# Altium PCB MB1642.PcbDoc
Units mil, origin at the board's own origin, x right, y up, seen from the top; angles counter-clockwise.
Board outline 2770.03 x 2960.03 mil, 2 copper layers (Top Layer, Bottom Layer), stack 61.811 mil thick; 33 components, 28 nets, 241 pads, 137 vias.
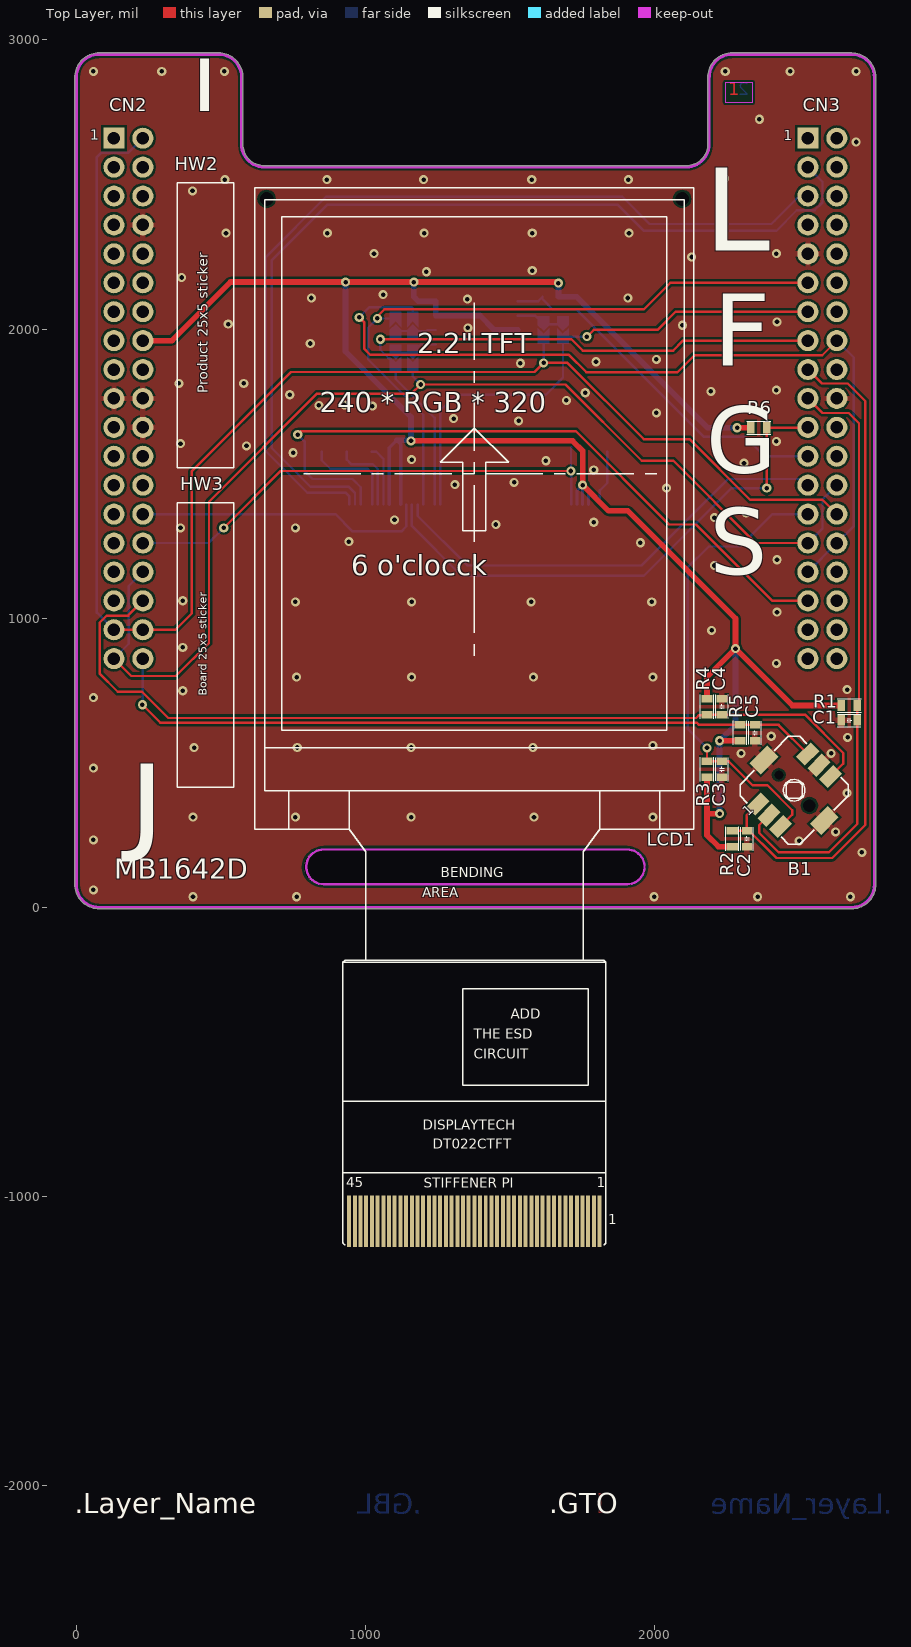
[diagram p0: Top Layer view]
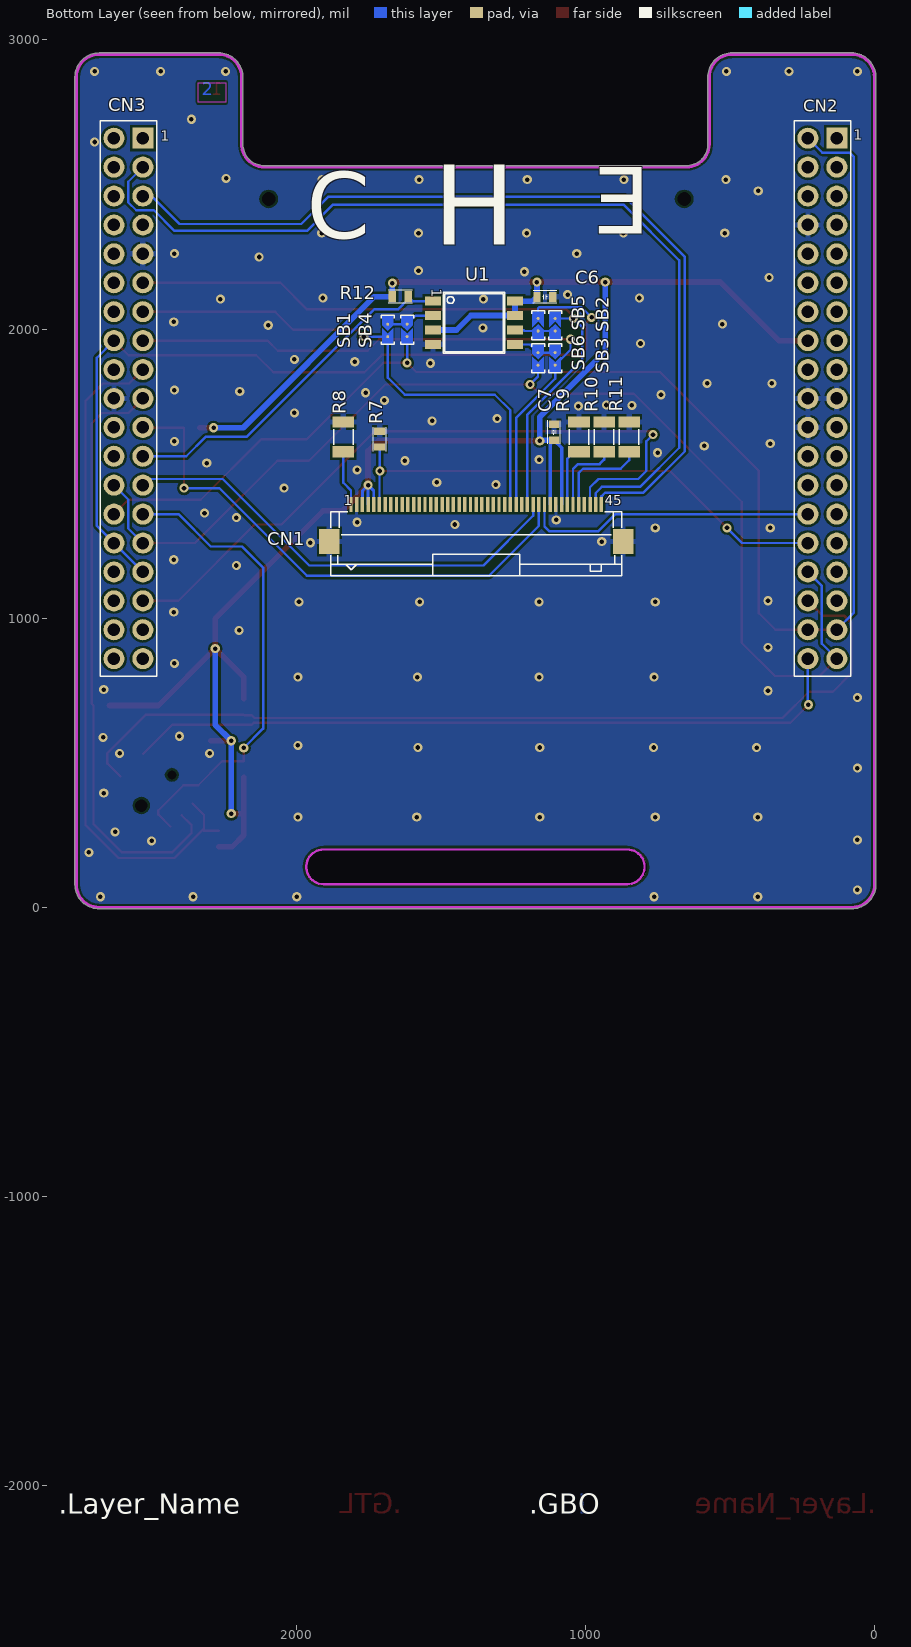
[diagram p1: Bottom Layer view, seen from below]
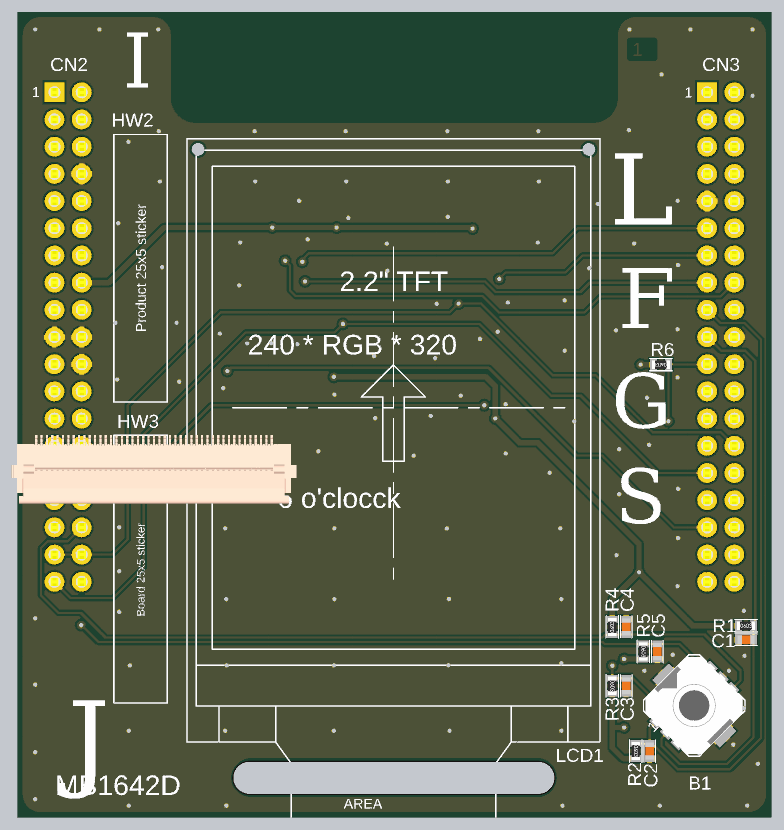
[diagram p2: 3D render of the assembled board from above, using the file's embedded part models]
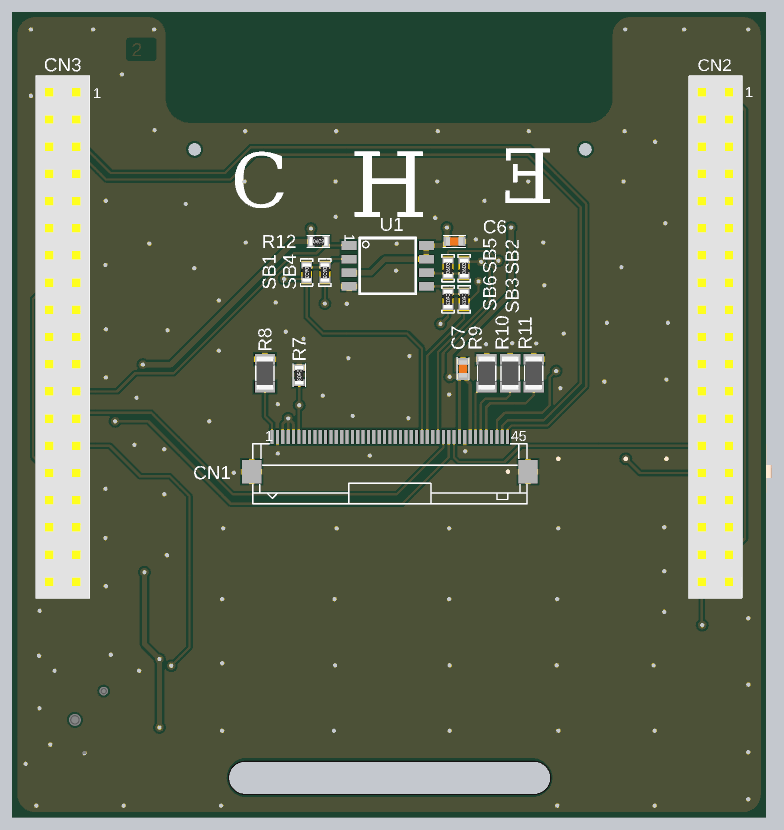
[diagram p3: 3D render of the assembled board from below, using the file's embedded part models]

## Layer stack, top to bottom
Top Solder: solder mask 0.5906, Solder Resist, Dk 3.5
Top Layer: signal copper 1.378
Dielectric 1: core 59.0551, FR-4, Dk 4.2
Bottom Layer: signal copper 1.378
Bottom Solder: solder mask 0.5906, Solder Resist, Dk 3.5

## Board outline
-5.01,78.74 ccw(c78.74,78.74) 78.74,-5.02 2677.17,-5.02 ccw(c2677.17,0) 2679.13,-4.61 ccw(c2681.1,0) 2681.1,-5.02 ccw(c2681.1,78.74) 2764.86,78.74 ccw(c2759.84,78.74) 2764.5,80.61 ccw(c2760,82.83) 2765.01,82.83 2765.01,2871.1 ccw(c2760,2871.1) 2764.85,2872.38 ccw(c2681.1,2871.26) 2681.1,2955.02 2267.72,2955.02 ccw(c2267.72,2871.26) 2183.96,2871.26 2183.96,2638.98 cw(c2110.24,2638.98) 2110.24,2565.25 ccw(c2110.24,2560.24) 2108.72,2565.02 804.26,2565.02 ccw(c802.74,2560.24) 802.74,2565.25 649.61,2565.25 cw(c649.61,2638.98) 575.88,2638.98 575.88,2871.26 cw(c570.87,2871.26) 575.88,2871.23 575.88,2871.26 ccw(c492.13,2871.26) 492.13,2955.02 78.74,2955.02 ccw(c78.74,2871.26) -5.01,2871.26

## Design rules (kind name [scope] priority, off if disabled: settings)
Clearance Clearance_SB [HasFootprint('SOLDER-BRIDGE_R0603-0R')] p1: gap=4 ignorepadtopadclearanceinfootprint=FALSE except(0: Arc-Hole Track-Hole SMDPad-Hole THPad-Hole Via-Hole Fill-Hole Poly-Hole Region-Hole Text-Hole)
Clearance [All] p2: gap=7.87 ignorepadtopadclearanceinfootprint=FALSE except(0: Arc-Hole Track-Hole SMDPad-Hole THPad-Hole Via-Hole Fill-Hole Poly-Hole Region-Hole Text-Hole)
ComponentClearance [All] p1: gap=7.87 collisioncheckmode=3 verticalgap=7.87 showdistances=FALSE
HoleSize [All] p1: absolutevalues=TRUE maxlimit=9999 minlimit=1 maxpercent=80.000 minpercent=20.000
MinimumSolderMaskSliver [All] p1: minsoldermaskwidth=2
PlaneConnect [All] p1: planeconnectstyle=Relief reliefexpansion=20 reliefentries=4 reliefconductorwidth=8.27 reliefairgap=8.27
PolygonConnect PolygonConnect_via [IsVia] p1: connectstyle=Direct reliefconductorwidth=10 reliefentries=4 polygonreliefangle="90 Angle" airgapwidth=10
PolygonConnect [All] p2: connectstyle=Relief reliefconductorwidth=20 reliefentries=4 polygonreliefangle="90 Angle" airgapwidth=7
RoutingVias [All] p1: holewidth=11.81 width=31.5 viastyle="Through Hole" minholewidth=11.81 minwidth=31.5 maxholewidth=11.81 maxwidth=31.5
SilkToSilkClearance [All] p1: silktosilkclearance=0.5
SilkToSolderMaskClearance [IsPad] p1: minsilkscreentomaskgap=0.5 clearancetoexposedcopper=TRUE
SolderMaskExpansion [All] p1: expansion=4 istentingtop=FALSE
Width [All] p1: maxlimit=39.37 minlimit=7.87 preferedwidth=7.87 minimp=50.000000 maximp=50.000000 favimp=50.000000
24 further rules are at their usual default settings.

## Components (designator, comment, footprint, x,y, rotation, side; value= is the part's Value field where it differs from the comment)
B1 "Joystick MT-008A_M" SWI_XIEJIA_MT-008A_6P 2482.35,405 r45 top value=MT-008A
C1 "Capacitor" C0603 2673.23,646.85 r0 top value=10nF
C2 "Capacitor" C0603 2318.9,237.4 r90 top value=10nF
C3 "Capacitor" C0603 2232.28,477.56 r90 top value=10nF
C4 "Capacitor" C0603 2232.28,694.09 r270 top value=10nF
C5 "Capacitor" C0603 2346.46,603.54 r90 top value=10nF
C6 "Capacitor" C0603 1139.65,2111.42 r180 bottom value=100nF
C7 "Capacitor" C0603 1108.15,1642.91 r270 bottom value=100nF
CN1 "FH12-45S-0.5SH(55)" CON_HRS_FH12-45S-05SH 1377.13,1393.11 r180 bottom
CN2 "Socket 19x2" CON_SAMTEC_SSW-119-01-X-D 180,1760 r90 bottom locked
CN3 "Socket 19x2" CON_SAMTEC_SSW-119-01-X-D 2580,1760 r90 bottom locked
HW2 "STICKER_PRODUCT" STICKER_PRODUCT_25X5 446.73,2012.99 r90 top value="Sticker product"
HW3 "STICKER_BOARD" STICKER_BOARD_25X5 446.73,906.69 r90 top value="Sticker board"
LCD1 "DT022CTFT" LCD_DISPLAYTECH_DT022CTFT_45P_P050 1376.5,1500 r0 top locked
R1 "Resistor" R0603 2673.23,698.03 r0 top value=10K
R2 "Resistor" R0603 2267.72,237.4 r270 top value=10K
R3 "Resistor" R0603 2181.1,477.56 r270 top value=10K
R4 "Resistor" R0603 2181.1,694.09 r90 top value=10K
R5 "Resistor" R0603 2295.28,603.54 r270 top value=10K
R6 "Resistor" R0603 2360.12,1658.66 r180 top value=10K
R7 "Resistor" R0603 1710.51,1619.29 r270 bottom value=10K
R8 "Resistor" R1206_H0P55 1836.5,1627.17 r270 bottom value=24R9
R9 "Resistor" R1206_H0P55 1021.54,1627.17 r270 bottom value=24R9
R10 "Resistor" R1206_H0P55 934.92,1627.17 r270 bottom value=24R9
R11 "Resistor" R1206_H0P55 848.31,1627.17 r270 bottom value=24R9
R12 "Resistor" R0603 1639.65,2111.42 r180 bottom value=10K
SB1 "SB_OFF" SOLDER-BRIDGE_R0603-0R 1682.95,1997.24 r270 bottom
SB2 "SB_OFF" SOLDER-BRIDGE_R0603-0R 1104.21,2012.99 r90 bottom
SB3 "SB_OFF" SOLDER-BRIDGE_R0603-0R 1104.21,1898.82 r270 bottom
SB4 "SB_OFF" SOLDER-BRIDGE_R0603-0R 1616.02,1997.24 r270 bottom
SB5 "SB_OFF" SOLDER-BRIDGE_R0603-0R 1163.27,2012.99 r90 bottom
SB6 "SB_OFF" SOLDER-BRIDGE_R0603-0R 1163.27,1898.82 r270 bottom
U1 "MX25L6433FM2I-08G" ICC_SOP8_5P23X5P28_P127 1385,2021.54 r270 bottom

## Footprints (in the part's own frame and the unit in brackets; to place one, negate y for a bottom-side part, rotate by r counter-clockwise, add the part's x,y. Pads: shape width x height; smd on the part's side, far side on the other; paste and mask are expansions set on the pad)
C0603 [mm]
  rect 0.64x0.89 smd mask+0.05: 1(-0.7,0) 2(0.7,0)
  silkscreen extent -1.05,-0.55 1.02,0.55, body extent -0.9,-0.5 0.9,0.5, height 1.4
CON_HRS_FH12-45S-05SH [mm] "MCD-01980"
  rect 0.3x1.3 smd mask+0.05: 1(-11,0) 2(-10.5,0) 3(-10,0) 4(-9.5,0) 5(-9,0) 6(-8.5,0) 7(-8,0) 8(-7.5,0) 9(-7,0) 10(-6.5,0) 11(-6,0) 12(-5.5,0) 13(-5,0) 14(-4.5,0) 15(-4,0) 16(-3.5,0) 17(-3,0) 18(-2.5,0) 19(-2,0) 20(-1.5,0) 21(-1,0) 22(-0.5,0) 23(0,0) 24(0.5,0) 25(1,0) 26(1.5,0) 27(2,0) 28(2.5,0) 29(3,0) 30(3.5,0) 31(4,0) 32(4.5,0) 33(5,0) 34(5.5,0) 35(6,0) 36(6.5,0) 37(7,0) 38(7.5,0) 39(8,0) 40(8.5,0) 41(9,0) 42(9.5,0) 43(10,0) 44(10.5,0) 45(11,0)
  rect 1.8x2.2 smd mask+0.05: MT1(12.9,-3.25) MT2(-12.9,-3.25)
  silkscreen extent -12.8,-6.25 12.8,-0.65, body extent -13.3,-6.25 13.3,0.15, height 4.8
CON_SAMTEC_SSW-119-01-X-D [mm] "MCD-01845"
  rect 1.85x1.85 / inner round 1.85 / far side rect 1.85x1.85 hole 1.1 mask+0.05: 1(22.86,-1.27)
  round 1.85 hole 1.1 mask+0.05: 2(22.86,1.27) 3(20.32,-1.27) 4(20.32,1.27) 5(17.78,-1.27) 6(17.78,1.27) 7(15.24,-1.27) 8(15.24,1.27) 9(12.7,-1.27) 10(12.7,1.27) 11(10.16,-1.27) 12(10.16,1.27) 13(7.62,-1.27) 14(7.62,1.27) 15(5.08,-1.27) 16(5.08,1.27) 17(2.54,-1.27) 18(2.54,1.27) 19(0,-1.27) 20(0,1.27) 21(-2.54,-1.27) 22(-2.54,1.27) 23(-5.08,-1.27) 24(-5.08,1.27) 25(-7.62,-1.27) 26(-7.62,1.27) 27(-10.16,-1.27) 28(-10.16,1.27) 29(-12.7,-1.27) 30(-12.7,1.27) 31(-15.24,-1.27) 32(-15.24,1.27) 33(-17.78,-1.27) 34(-17.78,1.27) 35(-20.32,-1.27) 36(-20.32,1.27) 37(-22.86,-1.27) 38(-22.86,1.27)
  silkscreen extent -24.39,-2.47 24.39,2.47, body extent -24.38,-2.48 24.39,2.48, height 8.51
ICC_SOP8_5P23X5P28_P127 [mm] "MCD-01740"
  rect 0.8x1.4 smd mask+0.05: 1(-1.905,-3.6) 2(-0.635,-3.6) 3(0.635,-3.6) 4(1.905,-3.6) 5(1.905,3.6) 6(0.635,3.6) 7(-0.635,3.6) 8(-1.905,3.6)
  silkscreen extent -2.67,-2.69 2.67,2.69, body extent -2.67,-4.05 2.67,4.05, height 2.17
LCD_DISPLAYTECH_DT022CTFT_45P_P050 [mm] "MCD-01982"
  rect 0.35x4.5 smd mask+0.038: 1(11,-65.68) 2(10.5,-65.68) 3(10,-65.68) 4(9.5,-65.68) 5(9,-65.68) 6(8.5,-65.68) 7(8,-65.68) 8(7.5,-65.68) 9(7,-65.68) 10(6.5,-65.68) 11(6,-65.68) 12(5.5,-65.68) 13(5,-65.68) 14(4.5,-65.68) 15(4,-65.68) 16(3.5,-65.68) 17(3,-65.68) 18(2.5,-65.68) 19(2,-65.68) 20(1.5,-65.68) 21(1,-65.68) 22(0.5,-65.68) 23(0,-65.68) 24(-0.5,-65.68) 25(-1,-65.68) 26(-1.5,-65.68) 27(-2,-65.68) 28(-2.5,-65.68) 29(-3,-65.68) 30(-3.5,-65.68) 31(-4,-65.68) 32(-4.5,-65.68) 33(-5,-65.68) 34(-5.5,-65.68) 35(-6,-65.68) 36(-6.5,-65.68) 37(-7,-65.68) 38(-7.5,-65.68) 39(-8,-65.68) 40(-8.5,-65.68) 41(-9,-65.68) 42(-9.5,-65.68) 43(-10,-65.68) 44(-10.5,-65.68) 45(-11,-65.68)
  round 0 hole 1.2 unplated mask+0.05: NPTH1(-18.25,24.13) NPTH2(18.25,24.13)
  silkscreen extent -19.29,-67.73 19.29,25.13, body extent -19.29,-67.73 19.29,25.13, height 2.5
R0603 [mm]
  rect 0.64x1 smd mask+0.05: 1(-0.7,0) 2(0.7,0)
  silkscreen extent -1.05,-0.58 1.05,0.58, body extent -0.9,-0.5 0.9,0.5, height 0.56
R1206_H0P55 [mm]
  rect 1x1.9 smd mask+0.05: 1(-1.3,0) 2(1.3,0)
  silkscreen extent -0.67,-0.85 0.67,0.85, body extent -1.6,-0.85 1.6,0.85, height 0.65
SOLDER-BRIDGE_R0603-0R [mil]
  round 10 smd paste-393.7: 1(-19.69,0) 2(23.62,0)
  Top Layer region: -5.91,19.68 13.78,0 -5.91,-19.69 47.24,-19.69 47.24,19.68 -5.91,19.68
  Top Layer region: -47.24,-19.69 -47.24,19.68 -15.75,19.68 3.94,0 -15.75,-19.69 -47.24,-19.69
  silkscreen extent -50,-23 50,23, body extent -36,-20 36,20, height 22
STICKER_BOARD_25X5 [mil] "Sticker to mention board reference + serial number"
  silkscreen extent -492,-98 492,98, body extent -492,-98 492,98, height 0
STICKER_PRODUCT_25X5 [mil] "Sticker to mention board CPN code"
  silkscreen extent -492,-98 492,98
SWI_XIEJIA_MT-008A_6P [mm] "MCD-00132"
  rect 1.8x1.1 smd mask+0.05: 1(-3.1,1.4) 2(-3.1,0) 3(-3.1,-1.4) 4(3.1,1.4) 5(3.1,0) 6(3.1,-1.4)
  rect 2.2x1.4 smd mask+0.05: 7(0,3.75) 8(0,-3.75)
  round 0 hole 0.8 unplated paste-10 mask+0.05: NPTH1(0,1.9)
  round 0 hole 1.1 unplated paste-10 mask+0.05: NPTH2(0,-1.9)
  silkscreen extent -3.7,-3.7 3.7,3.7, body extent -3.85,-3.75 3.85,3.75, height 5.2

## Part data
B1: library part MCD-00132, "Joystick, 4 dir, 1 OK", Manufacturer="XIEJIA ELECTRONICS", Manufacturer_Part_Number=MT-008A, BMS_Part_Number=9180124, ComponentLink1Description=Datasheet, ComponentLink1URL="http://tunmcdsvn.tun.st.com/Component_Datasheet_Library/Trunk/Misc/Xieja electronics_MT-008A", ECCN_EU=n/a, ECCN_US=n/a, Internal_Part_Number=MCD-00132, Part_Type=Misc, Provided_By=SUBCO, Status=Released
C1 C2 C3 C4 C5: library part MCD-01098, "Capacitor,10nF,100V,X7R,10%,0603", Alternate_Manufacturer=N/A, Manufacturer=YAGEO, Manufacturer_Part_Number=CC0603KRX7R0BB103, Package=C0603, Alternate_Manufacturer_Part_Number=N/A, BMS_Part_Number=N/A, ComponentLink1Description=Datasheet, ComponentLink1URL=http://tunmcdsvn.tun.st.com/Component_Datasheet_Library/Trunk/Capacitors/Yageo_Multilayer_Capacitor_NPO_X7R_100V_to_630V_0.47pF%20to%202.2uF/Yageo_Multilayer_Capacitor_NPO_X7R_100V_to_630V_0.47pF%20to%202.2uF.pdf, ECCN_EU=NEC, ECCN_US=EAR99, Internal_Part_Number=MCD-01098, Order_Code_Digikey=311-1788-1-ND, Order_Code_Farnell=1284119, Order_Code_RS=N/A, Part_Type=Capacitor, Provided_By=SUBCO, Status=Checked
C6 C7: library part MCD-00211, "Capacitor, MLCC, 100nF, 16V, X7R, +/-10%, 0603, T=0,8mm", Manufacturer=YAGEO, Manufacturer_Part_Number=CC0603KRX7R7BB104, Package=C0603, ComponentLink1URL=http://tunmcdsvn.tun.st.com/Component_Datasheet_Library/Trunk/Capacitors/Yageo_Multilayer_Capacitor_X7R_series_100pF_to_22uF, Internal_Part_Number=MCD-00211, Order_Code_Digikey=311-1088-1-ND, Order_Code_Farnell=432210, Order_Code_RS=669-8763, Part_Preference=Recommended, Part_Type=Capacitor, Status=Released
CN1: library part MCD-01980, "45 pins P 0.5 surface mount connector", Alternate_Manufacturer=N/A, Manufacturer=HIROSE, Alternate_Manufacturer_Part_Number=N/A, BMS_Part_Number=N/A, ComponentLink1Description=Datasheet, ComponentLink1URL=http://tunmcdsvn.tun.st.com/Component_Datasheet_Library/Trunk/Connectors/Hirose_FH12-45S-05SH/Hirose_FH12-45S-0.5SH(55).pdf, ECCN_EU=NEC, ECCN_US=EAR99, Internal_Part_Number=MCD-01980, Manufacturer_Part_Number=FH12-45S-0.5SH(55), Order_Code_Digikey=HFJ145CT-ND, Order_Code_Farnell=2427723, Order_Code_RS=772-7027, Part_Type=Connector, Provided_By=SUBCO, Status=Checked
CN2 CN3: library part MCD-01845, "Socket, 19x2, 2.54mm, VR, TH, Height 8.51mm/2.64mm", Manufacturer=SAMTEC, Manufacturer_Part_Number=SSW-119-01-x-D, ComponentLink1Description=Datasheet, ComponentLink1URL=http://tunmcdsvn.tun.st.com/Component_Datasheet_Library/Trunk/Connectors/Samtec_SSW-SSQ-series, ECCN_EU=n/a, ECCN_US=n/a, Internal_Part_Number=MCD-01845, Part_Type=Connector, Provided_By=SUBCO, Status=Checked
HW2: library part MCD-02189, "Sticker product 25x5 mm", Alternate_Manufacturer=N/A, Alternate_Manufacturer_Part_Number=N/A, ComponentLink1URL=N/A, Internal_Part_Number=MCD-02189, Manufacturer=N/A, Manufacturer_Part_Number=N/A, Order_Code_Digikey=N/A, Order_Code_Farnell=N/A, Order_Code_RS=N/A, Package=N/A, Part_Preference=Recommended, Part_Type=Misc, Status=Released
HW3: library part MCD-02190, "Sticker board 25x5 mm", Alternate_Manufacturer=N/A, Alternate_Manufacturer_Part_Number=N/A, ComponentLink1URL=N/A, Internal_Part_Number=MCD-02190, Manufacturer=N/A, Manufacturer_Part_Number=N/A, Order_Code_Digikey=N/A, Order_Code_Farnell=N/A, Order_Code_RS=N/A, Package=N/A, Part_Preference=Recommended, Part_Type=Misc, Status=Released
LCD1: library part MCD-01982, "240x320 2.2inch display", Manufacturer=DISPLAYTECH, ComponentLink1Description=Datasheet, ComponentLink1URL=http://tunmcdsvn.tun.st.com/Component_Datasheet_Library/Trunk/Display/Displaytech_LCD_DT022CTFT/DisplayTech_2.2_240x320.pdf, ECCN_EU=NEC, ECCN_US=EAR99, Internal_Part_Number=MCD-01982, Manufacturer_Part_Number=DT022CTFT, Order_Code_RS=182-5796, Part_Type=Display, Provided_By=SUBCO, Status=Checked
R1 R2 R3 R4 R5 R6 R7 R12: library part MCD-00220, "Resistor,10K,0603,1%,1/10W", Manufacturer=YAGEO, Manufacturer_Part_Number=RC0603FR-0710KL, Package=R0603, ComponentLink1Description=Datasheet, ComponentLink1URL=http://tunmcdsvn.tun.st.com/Component_Datasheet_Library/Trunk/Resistors/Yageo_Resistor_RC0603-series, ECCN_EU=NEC, ECCN_US=EAR99, Internal_Part_Number=MCD-00220, Part_Type=Resistor, Provided_By=SUBCO, Status=Released
R8 R9 R10 R11: library part MCD-02611, "Resistor, 24R9, 1206, +/-1%, 1/4W", Manufacturer=YAGEO, Manufacturer_Part_Number=RC1206FR-0724R9L, Package=1206, ComponentLink1URL=http://tunmcdsvn.tun.st.com/Component_Documentation_Library/Trunk/Resistor/YAGEO_RC_L_Series/, Internal_Part_Number=MCD-02611, Order_Code_Digikey=311-24.9FRTR-ND, Order_Code_Farnell=3496190RL, Order_Code_RS=N/A, Part_Preference=Recommended, Part_Type=Resistor, Status=Checked
SB1 SB2 SB3 SB4 SB5 SB6: library part MCD-00072, "Solder Bridge OFF", Manufacturer=YAGEO, Manufacturer_Part_Number=RC0603JR-070RL, Package=SB0603, ComponentLink1URL=http://tunmcdsvn.tun.st.com/Component_Datasheet_Library/Trunk/Resistors/Yageo_Resistor_RC0603-series, Internal_Part_Number=MCD-00072, Part_Preference=Recommended, Part_Type=Misc, Status=Released
U1: library part MCD-01981, Alternate_Manufacturer=N/A, Manufacturer=MACRONIX, Package="SOP8 200", Alternate_Manufacturer_Part_Number=N/A, BMS_Part_Number=N/A, ComponentLink1Description=Datasheet, ComponentLink1URL=http://tunmcdsvn.tun.st.com/Component_Datasheet_Library/Trunk/IC/Macronix_NOR_QSPI_MX25L6433F/, ECCN_EU=NEC, ECCN_US=3A991.B.1.A, Internal_Part_Number=MCD-01981, Manufacturer_Part_Number=MX25L6433FM2I-08G, Order_Code_Digikey=MX25L6433FM2I-08G-ND, Order_Code_Farnell=3129181, Order_Code_RS=170-3096, Part_Type=IC, Provided_By=SUBCO, Status=Checked

## Free pads (board coordinates)
  round 20 on Mech16: 1(453.33,-2368.58) 1(2376.46,-2368.58)
  oval 1181.1x118.11 hole 118.11 slot 1181.1 at 0 deg unplated: ""(1377.95,138.98)

## Via types
v1: diameter 31.5, hole 15.75, Top Layer to Bottom Layer, tented both sides, 137 vias

## Nets (pads, with @x,y where several pads share a name; then routed paths per layer and width w, separated by ;. In a path a pad name is that pad's centre, name@x,y a point inside that pad or via, vN(x,y) a via of type N, cw(c..) or ccw(c..) an arc to the next point about the centre after c; other vN are vias at no path point)
3V3: C6.1 C7.2 CN1.3 CN1.4 CN1.5 CN1.36 CN1.38 CN2.16 R1.1 R2.2 R3.2 R4.2 R5.2 R6.2 R12.1 U1.3 U1.7 U1.8 | length 7506.2
  Top Layer w19.68: CN2.16 330.75,1960 533.35,2162.6 v1(930.98,2162.6) v1(1167.2,2162.6) 1663.27,2162.6 v1(1667.2,2158.66) ; v1(1157.36,1613.39) 1716.42,1613.39 1751.14,1578.66 v1(1751.14,1460.55) 1840.43,1371.26 1907.36,1371.26 2279.53,999.09 v1(2279.53,894.88) ; R3.2 2181.1,324.02 ; R4.2 2181.1,796.46 v1(2279.53,894.88) ; v1(2224.41,324.02) 2181.1,324.02 ; v1(2224.41,575.98) R5.2 ; R2.2 2220.47,209.84 2181.1,249.21 2181.1,324.02 ; v1(2285.31,1658.66) R6.2 ; R1.1 2476.38,698.03 v1(2279.53,894.88)
  Bottom Layer w10: CN1.5 1731.46,1440.87 v1(1751.14,1460.55) ; CN1.4 v1(1751.14,1460.55) ; CN1.3 1770.83,1440.87 v1(1751.14,1460.55)
  Bottom Layer w11.81: CN1.38 1081.85,1589.06 C7.2 1121.22,1602.28 CN1.36
  Bottom Layer w19.68: v1(1167.2,2162.6) C6.1 1182.09,2096.54 U1.8 U1.7 1395.59,2046.54 ; v1(1667.2,2158.66) R12.1 1730.2,2111.42 2182.95,1658.66 v1(2285.31,1658.66) ; v1(2224.41,324.02) v1(2224.41,575.98) 2279.53,631.1 v1(2279.53,894.88)
  Bottom Layer w20: v1(930.98,2162.6) 930.98,1922.44 1157.36,1696.06 v1(1157.36,1613.39) 1155.39,1615.35 C7.2 ; 1395.59,2046.54 1445.59,1996.54 U1.3
DISP_NRESET: CN1.6 CN2.30 R7.2 | length 1783.7
  Top Layer w8.27: v1(509.72,1312.2) 706.57,1509.06 v1(1710.51,1509.06)
  Bottom Layer w8.27: CN2.30 457.52,1260 v1(509.72,1312.2) ; CN1.6 1711.77,1507.8 v1(1710.51,1509.06) 1710.51,1589.65 R7.2@1712.6,1591.73
DISP_TE: CN1.35 CN2.28 | length 1018.4
  Bottom Layer w8.27: CN2.28 895.91,1360 955.51,1300.39 1123.9,1300.39 1140.91,1317.4 CN1.35
GND: B1.5 B1.7 B1.8 C1.1 C2.1 C3.1 C4.1 C5.1 C6.2 C7.1 CN1.2 CN1.37 CN1.MT1 CN1.MT2 CN2.8 CN2.19 CN2.20 CN2.22 CN3.9 CN3.20 R7.1 R8.1 R9.1 R10.1 R11.1 U1.4
  other v1: 403.43,36.61 761.69,36.61 1997.91,36.61 2356.18,36.61 2677.17,36.61 59.06,60.24 2716.54,190.16 2499.79,229.53 59.06,233.46 2625.98,261.02 403.43,312.2 757.76,312.2 1157.48,312.2 1582.68,312.2 1993.98,312.2 2665.35,394.88 59.06,481.5 2299.21,532.68 2610.24,532.68 407.36,552.36 763.78,552.76 1157.48,552.76 1578.74,552.76 1993.98,560.24 2667.2,587.8 2403.43,591.73 59.06,725.59 367.99,749.21 2665.35,753.15 761.69,796.46 1159.33,796.46 1580.59,796.46 1993.98,796.46 2421.26,843.7 367.99,898.82 2196.85,957.87 2423.11,1020.87 757.76,1056.3 1159.33,1056.3 1572.72,1056.3 1990.04,1056.3 367.99,1060.24 2206.57,1182.28 2423.11,1201.97 1950.67,1261.02 942.8,1264.96 360.12,1312.2 757.76,1312.2 1450.67,1324.02 1789.25,1331.89 1100.28,1339.76 2206.57,1347.64 2316.81,1363.39 2041.22,1450 1308.94,1461.81 1513.66,1469.69 1789.25,1512.99 2308.94,1536.61 1623.9,1544.49 1159.33,1548.43 749.88,1572.05 588.46,1595.67 360.12,1603.54 2421.26,1611.42 1529.41,1682.28 1305,1690.16 2005.79,1709.84 1023.62,1733.46 838.58,1736.22 927.05,1737.4 1694.76,1753.15 738.07,1772.83 1759.84,1779.53 2194.76,1784.65 2421.26,1788.58 354.33,1812.2 578.74,1812.2 1535.43,1881.89 1797.13,1887.01 2005.79,1894.88 808.94,1950 1354.33,2003.94 2096.34,2012.99 525.47,2016.93 2423.11,2024.8 1352.24,2103.54 2261.69,2103.54 812.87,2107.48 1907.36,2107.48 1060.91,2119.29 364.06,2178.35 1210.51,2198.03 1576.65,2201.97 2127.83,2249.21 1029.41,2261.02 2421.26,2261.02 517.6,2331.89 867.99,2331.89 1202.64,2331.89 1576.65,2331.89 1911.3,2331.89 401.57,2477.56 513.66,2516.93 866.14,2516.93 1200.79,2516.93 1574.8,2516.93 1909.45,2516.93 2242.01,2520.87 2696.85,2646.85 2362.2,2725.59 59.06,2890.94 295.28,2890.94 511.81,2890.94 2244.09,2890.94 2468.5,2890.94 2696.85,2890.94
I2C_SCL: CN1.44 CN3.3 | length 3248.1
  Bottom Layer w8.27: CN1.44 963.74,1432.99 942.8,1453.94 810.5,1453.94 675.08,1589.36 675.08,2237.4 867.99,2430.31 1871.93,2430.31 1962.87,2339.37 2420.35,2339.37 2491.61,2410.63 2553.03,2410.63 2580.59,2438.19 2580.59,2509.41 CN3.3
I2C_SDA: CN1.45 CN3.5 | length 3110.1
  Bottom Layer w8.27: CN1.45 944.06,1421.18 930.98,1434.25 798.69,1434.25 655.39,1577.55 655.39,2249.21 864.06,2457.87 1887.68,2457.87 1982.17,2363.39 2403.43,2363.39 ; 2415.24,2375.2 2403.43,2363.39 ; CN3.5 2500.04,2460 2403.43,2363.39
INT: CN1.43 CN3.33 | length 2425.2
  Top Layer w8.27: v1(765.63,1635.04) 777.44,1646.85 1727.17,1646.85 2050,1324.02 2143.58,1324.02 2407.6,1060 CN3.33
  Bottom Layer w8.27: v1(765.63,1635.04) 789.25,1611.42 789.25,1509.06 816.81,1481.5 954.61,1481.5 983.43,1452.68 CN1.43
KEY_CENTER: B1.2 C1.2 CN3.19 R1.2 | length 2083.3
  Top Layer w8.27: B1.2 2361.99,284.65 2361.99,257.09 2428.92,190.16 2602.36,190.16 2700.79,288.58 C1.2 R1.2 2706.57,703.82 2706.57,1674.41 2671.14,1709.84 2580.16,1709.84 CN3.19
KEY_DOWN: B1.3 C3.2 CN3.27 R3.1 | length 1628.6
  Top Layer w8.27: v1(2181.1,551.18) R3.1 C3.2 2255.91,505.12 2338.58,422.44 2389.76,422.44 2476.17,336.04 2476.17,320.87 B1.3
  Bottom Layer w8.27: v1(2181.1,551.18) 2114.17,618.11 2114.17,1175.08 2187.13,1248.03 2295.28,1248.03 2407.24,1360 CN3.27
KEY_LEFT: B1.1 C2.2 CN3.17 R2.1 | length 2361.2
  Top Layer w8.27: R2.1 C2.2 ; B1.1 2318.69,319.29 2318.69,272.83 2421.05,170.47 2614.17,170.47 2728.35,284.65 2728.35,1751.06 2667.83,1811.57 2578.42,1811.57 CN3.17
KEY_RIGHT: B1.6 C4.2 CN2.34 R4.1 | length 3152.3
  Top Layer w8.27: CN2.34 179.02,1009.02 105.16,1009.02 80.59,984.45 80.59,808.27 143.25,745.61 226.83,745.61 317.72,654.72 2143.7,654.72 2153.86,664.88 2179.45,664.88 R4.1 C4.2 2519.69,666.54 2652.54,533.68 2652.54,497.24 B1.6
KEY_UP: B1.4 C5.2 CN2.38 R5.1 | length 2531.9
  Top Layer w8.27: v1(228.35,700.79) 290.55,638.58 2146.06,638.58 2153.54,631.1 R5.1 C5.2 2428.85,631.1 B1.4
  Bottom Layer w8.27: v1(228.35,700.79) 230,702.44 CN2.38
NetCN1_1: CN1.1 R8.2 | length 193.8
  Bottom Layer w8.27: CN1.1 1810.2,1442.13 1836.5,1468.43 R8.2
NetCN1_39: CN1.39 R9.2 | length 208.9
  Bottom Layer w8.27: R9.2 1037.28,1575.98 1062.17,1551.1 CN1.39
NetCN1_40: CN1.40 R10.2 | length 271.2
  Bottom Layer w8.27: R10.2 934.92,1548.43 950.28,1533.07 1025.08,1533.07 1042.48,1515.67 CN1.40
NetCN1_41: CN1.41 R11.2 | length 331.3
  Bottom Layer w8.27: R11.2 848.31,1546.46 877.83,1516.93 1007.87,1516.93 1022.8,1502.01 CN1.41
SPI_MISO: SB1.1 SB4.1 U1.2 | length 168.5
  Bottom Layer w8.27: U1.2 1586.42,2046.54 SB4.1 SB1.1
SPI_MOSI: SB3.1 SB6.1 U1.5 | length 150.7
  Bottom Layer w8.27: SB3.1 SB6.1 1191.3,1946.54 U1.5
SPI_SCK: SB2.1 SB5.1 U1.6 | length 140.4
  Bottom Layer w8.27: SB2.1 SB5.1 1210.51,1993.31 1213.74,1996.54 U1.6
SPIA_DCX: CN1.33 CN3.25 | length 1592.7
  Bottom Layer w8.27: CN1.33 1180.28,1354.25 1352.24,1182.28 1954.61,1182.28 2253.82,1481.5 2508.5,1481.5 CN3.25
SPIA_MISO: CN1.29 CN3.13 SB1.2 | length 1821.1
  Top Layer w8.27: v1(1765.63,1973.62) 1789.25,1997.24 2009.72,1997.24 2072.48,2060 CN3.13
  Bottom Layer w8.27: CN1.29 1259.02,1718.98 1312.87,1772.83 1623.9,1772.83 1682.95,1831.89 SB1.2 v1(1765.63,1973.62)
SPIA_MOSI: CN1.30 CN3.15 SB3.2 | length 2158.9
  Top Layer w8.27: v1(1051.18,1964.57) 1712.6,1964.57 1751.97,1925.2 2063.66,1925.2 2098.46,1960 CN3.15
  Bottom Layer w8.27: v1(1051.18,1964.57) 1051.18,1928.23 SB3.2 1104.21,1827.95 1239.33,1692.83 CN1.30
SPIA_NCS: CN1.34 CN3.21 R6.1 | length 1849.6
  Top Layer w8.27: v1(2387.68,1450) R6.1 2528.66,1658.66 CN3.21
  Bottom Layer w8.27: CN1.34 1160.59,1318.82 1332.36,1147.05 1962.68,1147.05 2265.63,1450 v1(2387.68,1450)
SPIA_SCK: CN1.32 CN3.11 SB2.2 | length 2342.8
  Top Layer w8.27: v1(1041.22,2036.61) 1041.22,2044.49 1064.84,2068.11 1962.48,2068.11 2054.37,2160 CN3.11
  Bottom Layer w8.27: SB2.2 v1(1041.22,2036.61) 1009.72,2005.12 1009.72,1894.88 1199.96,1704.65 CN1.32
SPIB_MISO: CN2.2 CN2.35 CN2.36 CN3.28 SB4.2 | length 5323.1
  Top Layer w8.27: CN2.35 CN2.36 342.56,960 399.49,1016.93 399.49,1509.06 742.01,1851.57 1584.53,1851.57 v1(1616.02,1883.07) 1698.7,1883.07 1962.48,1619.29 2119.96,1619.29 2329.8,1409.45 2580.55,1409.45 CN3.28
  Bottom Layer w8.27: CN2.35 70.87,1019.13 70.87,2594.49 86.61,2610.24 180.23,2610.24 CN2.2 ; v1(1616.02,1883.07) SB4.2
SPIB_MOSI: CN2.32 CN2.37 CN3.26 CN3.29 SB6.2 | length 4016.8
  Top Layer w8.27: CN2.37 190.04,799.96 343.94,799.96 458.54,914.57 458.54,1402.76 832.56,1776.77 1159.33,1776.77 v1(1190.83,1808.27) 1691.73,1808.27 1955.51,1544.49 2064.84,1544.49 2349.33,1260 CN3.29
  Bottom Layer w8.27: CN2.37 181.41,911.42 181.41,1111.42 CN2.32 ; SB6.2 1163.27,1835.83 v1(1190.83,1808.27) ; CN3.29 2580.59,1310.59 2580.59,1410.59 CN3.26
SPIB_NCS: CN3.23 R12.2 U1.1 | length 1242.4
  Bottom Layer w8.27: U1.1 1597.2,2096.54 R12.2 1612.09,2103.54 1647.52,2068.11 1730.2,2068.11 2171.14,1627.17 2312.87,1627.17 2380.04,1560 CN3.23
SPIB_SCK: CN3.16 CN3.30 CN3.31 SB5.2 | length 2956.5
  Top Layer w8.27: v1(978.23,2040.55) 996.06,2022.72 996.06,1931.41 1016.64,1910.83 1703.35,1910.83 1763.78,1850.39 2078.74,1850.39 2137.8,1909.45 2579.45,1909.45 CN3.16
  Bottom Layer w8.27: v1(978.23,2040.55) 1013.66,2075.98 1159.33,2075.98 1163.27,2072.05 SB5.2 ; CN3.31 CN3.30 2688.98,1318.98 2688.98,1901.02 CN3.16
pads on no net: B1.NPTH1 B1.NPTH2 CN1.7 CN1.8 CN1.9 CN1.10 CN1.11 CN1.12 CN1.13 CN1.14 CN1.15 CN1.16 CN1.17 CN1.18 CN1.19 CN1.20 CN1.21 CN1.22 CN1.23 CN1.24 CN1.25 CN1.26 CN1.27 CN1.28 CN1.31 CN1.42 CN2.1 CN2.3 CN2.4 CN2.5 CN2.6 CN2.7 CN2.9 CN2.10 CN2.11 CN2.12 CN2.13 CN2.14 CN2.15 CN2.17 CN2.18 CN2.21 CN2.23 CN2.24 CN2.25 CN2.26 CN2.27 CN2.29 CN2.31 CN2.33 CN3.1 CN3.2 CN3.4 CN3.6 CN3.7 CN3.8 CN3.10 CN3.12 CN3.14 CN3.18 CN3.22 CN3.24 CN3.32 CN3.34 CN3.35 CN3.36 CN3.37 CN3.38 LCD1.1 LCD1.2 LCD1.3 LCD1.4 LCD1.5 LCD1.6 LCD1.7 LCD1.8 LCD1.9 LCD1.10 LCD1.11 LCD1.12 LCD1.13 LCD1.14 LCD1.15 LCD1.16 LCD1.17 LCD1.18 LCD1.19 LCD1.20 LCD1.21 LCD1.22 LCD1.23 LCD1.24 LCD1.25 LCD1.26 LCD1.27 LCD1.28 LCD1.29 LCD1.30 LCD1.31 LCD1.32 LCD1.33 LCD1.34 LCD1.35 LCD1.36 LCD1.37 LCD1.38 LCD1.39 LCD1.40 LCD1.41 LCD1.42 LCD1.43 LCD1.44 LCD1.45 LCD1.NPTH1 LCD1.NPTH2

## Polygon pours and split planes (outlines as drawn)
GND on Bottom Layer "GND_L02_P001" (solid, remove dead copper, pour order 1): -17.7,2975 -7.7,2985 2782.3,2985 2782.3,-25 2792.3,-35 2767.3,-60 -32.7,-60 -32.7,2970 -17.7,2985
GND on Top Layer "GND_L01_P000" (solid, remove dead copper, pour order 0): -17.7,2980 -7.7,2990 2782.3,2990 2782.3,-20 2792.3,-30 2767.3,-55 -32.7,-55 -32.7,2975 -17.7,2990

## Keep-outs
Keep-Out Layer:
  rectangle: 2244.09,2783.66 2338.58,2852.56
  lines w8.27: 855,80 cw(c855,140) 855,200 1905,200 cw(c1905,140) 1905,80 855,80
  lines w10: 0,2871.1 0,78.74 ccw(c78.74,78.74) 78.74,0 2681.1,0 ccw(c2681.1,78.74) 2759.84,78.74 ; 0.16,2871.26 cw(c78.9,2871.26) 78.9,2950 492.13,2950 ; 492.13,2949.84 cw(c492.13,2871.1) 570.87,2871.1 ; 570.87,2871.26 570.87,2638.9 ccw(c649.61,2638.9) 649.61,2560.16 ; 649.76,2560 2109.84,2560 ; 2110.08,2560.24 ccw(c2110.08,2638.98) 2188.82,2638.98 ; 2188.98,2639.13 2188.98,2871.1 ; 2189.13,2871.26 cw(c2267.87,2871.26) 2267.87,2950 2360,2950 2680.94,2950 ; 2681.1,2949.84 cw(c2681.1,2871.1) 2759.84,2871.1 ; 2760,78.74 2760,2870.94

## Other copper
Top Layer:
  text "1" at 2253.94,2793.5 h78.74
  text ".Layer_Name" at -6.11,-2118.64 h118.11
  text ".GTL" at 1635.42,-2118.64 h118.11
Bottom Layer:
  text "2" at 2326.77,2792.52 h78.74
  text ".GBL" at 1194.35,-2119.9 h118.11
  text ".Layer_Name" at 2820.88,-2119.9 h118.11

## Silkscreen, mask and mechanical layers (free items; w line width, h text height)
Top Overlay:
  text "CN2" at 114.17,2738.28 h78.74
  text "CN3" at 2511.81,2738.28 h78.74
  text "I" at 490.04,2678.35 h393.7
  text "1" at 47.24,2642.91 h59.06
  text "1" at 2446.87,2641.47 h59.06
  text "L" at 2171.14,2174.41 h511.81
  text "F" at 2202.64,1792.52 h433.07
  text "G" at 2179.02,1426.38 h393.7
  text "S" at 2190.83,1075.98 h393.7
  text "J" at 179.02,142.91 h551.18
  text "MB1642D" at 131.77,75.98 h118.11
  text ".Layer_Name" at -6.11,-2118.64 h118.11
  text ".GTO" at 1635.42,-2118.64 h118.11
Bottom Overlay:
  text "E" at 773.5,2253.15 h393.7
  text "C" at 1962.48,2237.4 h393.7
  text "H" at 1525.47,2201.97 h472.44
  text ".GBO" at 1194.35,-2119.9 h118.11
  text ".Layer_Name" at 2820.88,-2119.9 h118.11
Top Paste:
  text ".Layer_Name" at -6.11,-2118.64 h118.11
  text ".GTP" at 1635.42,-2118.64 h118.11
Bottom Paste:
  text ".GBP" at 1194.35,-2119.9 h118.11
  text ".Layer_Name" at 2820.88,-2119.9 h118.11
Top Solder:
  text ".Layer_Name" at -6.11,-2118.64 h118.11
  text ".GTS" at 1635.42,-2118.64 h118.11
Bottom Solder:
  text ".GBS" at 1194.35,-2119.9 h118.11
  text ".Layer_Name" at 2820.88,-2119.9 h118.11
M1-Board Shape:
  lines w10: 726.05,2560 2110.24,2560 ; 802.5,2560 802.74,2560.24 649.61,2560.24 cw(c649.61,2638.98) 570.87,2638.98 570.87,2810.43 570.87,2871.26 ccw(c492.13,2871.26) 492.13,2950 393.7,2950 78.74,2950 ccw(c78.74,2871.26) 0,2871.26 0,78.74 ccw(c78.74,78.74) 78.74,0 2677.17,0 ; 2110.24,2560.24 ccw(c2110.24,2638.98) 2188.98,2638.98 2188.98,2871.26 cw(c2267.72,2871.26) 2267.72,2950 2362.2,2950 2681.1,2950 cw(c2681.1,2871.26) 2759.84,2871.26 ; 2681.1,0 ccw(c2681.1,78.74) 2759.84,78.74 ; 2760,82.83 2760,2871.1 ; 855,80.94 cw(c855,140) 855,199.06 1905,199.06 cw(c1905,140) 1905,80.94 855,80.94
M2-Board Dimensions:
  text ".Layer_Name" at -6.11,-2118.64 h118.11
  text ".GM2" at 1635.42,-2118.64 h118.11
M14-Top Assembly:
  text ".Layer_Name" at -6.11,-2118.64 h118.11
  text ".GM14" at 1635.42,-2118.64 h118.11
M15-Bottom Assembly:
  text ".GM15" at 1194.35,-2119.9 h118.11
  text ".Layer_Name" at 2820.88,-2119.9 h118.11
Drill Drawing:
  drawing of 306 lines, arcs and shapes, not listed
  text "PCB SPECIFICATIONS :" at 53.21,4945.61 h118.11
  text "PCB : TYPE 3" at 5859.97,4938.82 h118.11
  text "A.   MATERIAL :" at 53.21,4788.12 h118.11
  text "FR-4" at 1568.96,4788.12 h118.11
  text "TG-170" at 2218.56,4788.12 h118.11
  text "X  TG-150" at 2937.07,4788.12 h118.11
  text "TG-140" at 3566.99,4788.12 h118.11
  text "ASPECT-RATIO, AXE Z :" at 5859.97,4722.29 h118.11
  text "B.   MATERIAL FAMILY :" at 53.21,4670.01 h118.11
  text "N/A" at 1568.96,4670.01 h118.11
  text "C.   SOLDERMASK COLOR :" at 53.21,4551.9 h118.11
  text "GREEN" at 1568.96,4551.9 h118.11
  text "WHITE" at 2218.56,4551.9 h118.11
  text "RED" at 2937.07,4551.9 h118.11
  text "BLACK" at 3566.99,4551.9 h118.11
  text "X  Blue ink PANTONE 2955" at 4226.38,4550.39 h118.11
  text "6:1 to 8:1 / LEVEL \"B\"" at 5860.7,4456.63 h118.11
  text "D.   SILKSCREEN COLOR :" at 53.21,4433.79 h118.11
  text "X  WHITE" at 1568.96,4433.79 h118.11
  text "YELLOW" at 2218.56,4433.79 h118.11
  text "BLACK" at 2937.07,4433.79 h118.11
  text "Blue ink PANTONE 2955" at 3566.99,4433.79 h118.11
  text "E.   SURFACE FINISH :" at 53.21,4315.68 h118.11
  text "X  ENIG" at 1568.96,4315.68 h118.11
  text "IMMERSION SILVER" at 2218.56,4315.68 h118.11
  text "IMMERSION TIN" at 3566.99,4315.68 h118.11
  text "MINIMUM PARAMETERS" at 5861.77,4236.12 h118.11
  text "HASL" at 1568.96,4197.57 h118.11
  text "HASL (PB-FREE)" at 2218.56,4197.57 h118.11
  text "GOLDEN FINGER" at 3566.99,4197.57 h118.11
  text "F.   IMPEDANCE CONTROL :" at 53.21,4079.46 h118.11
  text "X   NO" at 1568.96,4079.46 h118.11
  text "YES  (SEE IMPEDANCE TABLE FOR DETAIL INFORMATION)" at 2218.56,4079.46 h118.11
  text "DEFAULT" at 5861.77,4019.59 h118.11
  text "G.   THROUGH VIA :" at 53.21,3961.35 h118.11
  text "PLUG THE VIAS WHICH ARE COVERED WITH SOLDERMASK ONE OR TWO SIDE." at 1568.96,3961.35 h118.11
  text "PLUG MATERIAL :" at 1568.96,3843.24 h118.11
  text "X  SOLDERMASK" at 2572.89,3843.24 h118.11
  text "NON-CONDUCTIVE EPOXY." at 3566.99,3843.24 h118.11
  text "TRACKS : 0.21mm           / GAPS : 0.21mm" at 5861.77,3793.21 h118.11
  text "H.   STACK-UP :" at 53.21,3725.13 h118.11
  text "SEE LAYER STACK-UP SEQUENCE FOR OVERALL THICKNESS." at 1568.96,3725.13 h118.11
  text "Layer" at 3037.62,3172.72 h118.11
  text "Name" at 3532.01,3172.72 h118.11
  text "Material" at 4488.19,3172.72 h118.11
  text "Thickness" at 5347.42,3172.72 h118.11
  text "Constant" at 6053.19,3172.72 h118.11
  text "Board Layer Stack" at 6706.39,3172.72 h118.11
  text "Top Overlay" at 3532.01,2936.5 h118.11
  text "Top Solder" at 3532.01,2700.28 h118.11
  text "Solder Resist" at 4488.19,2700.28 h118.11
  text "0.015mm" at 5347.42,2700.28 h118.11
  text "3.5" at 6053.19,2700.28 h118.11
  text "1" at 3037.62,2464.06 h118.11
  text "Top Layer" at 3532.01,2464.06 h118.11
  text "0.035mm" at 5347.42,2464.06 h118.11
  text "Dielectric 1" at 3532.01,2227.84 h118.11
  text "FR-4" at 4488.19,2227.84 h118.11
  text "1.500mm" at 5347.42,2227.84 h118.11
  text "4.2" at 6053.19,2227.84 h118.11
  text "2" at 3037.51,1991.62 h118.11
  text "Bottom Layer" at 3532.01,1991.62 h118.11
  text "0.035mm" at 5347.42,1991.62 h118.11
  text "Bottom Solder" at 3532.01,1755.4 h118.11
  text "Solder Resist" at 4488.19,1755.4 h118.11
  text "0.015mm" at 5347.42,1755.4 h118.11
  text "3.5" at 6053.19,1755.4 h118.11
  text "Bottom Overlay" at 3532.01,1519.18 h118.11
  text "Symbol" at 3034.51,880.12 h72
  text "Count" at 3540.38,880.12 h72
  text "Hole Size" at 4130.23,880.12 h72
  text "Plated" at 5249.9,880.12 h72
  text "Hole Type" at 5755.78,880.12 h72
  text "Drill Layer Pair" at 6489.58,880.12 h72
  text "Via/Pad" at 7989.13,880.12 h72
  text "Pad Shape" at 8578.98,880.12 h72
  text "Template" at 9324.78,880.12 h72
  text "Description" at 10784.34,880.12 h72
  text "Hole Tolerance (+)" at 11638.1,880.12 h72
  text "Hole Tolerance (-)" at 12971.71,880.12 h72
  text "1" at 3540.38,730.12 h60
  text "31.50mil (0.800mm)" at 4130.23,730.12 h60
  text "NPTH" at 5249.9,730.12 h60
  text "Round" at 5755.78,730.12 h60
  text "Top Layer - Bottom Layer" at 6489.58,730.12 h60
  text "Pad" at 7989.13,730.12 h60
  text "Rounded" at 8578.98,730.12 h60
  text "c0hn80m85p1000" at 9324.78,730.12 h60
  text "1" at 3540.38,580.12 h60
  text "43.31mil (1.100mm)" at 4130.23,580.12 h60
  text "NPTH" at 5249.9,580.12 h60
  text "Round" at 5755.78,580.12 h60
  text "Top Layer - Bottom Layer" at 6489.58,580.12 h60
  text "Pad" at 7989.13,580.12 h60
  text "Rounded" at 8578.98,580.12 h60
  text "c0hn110m115p1000" at 9324.78,580.12 h60
  text "1" at 3540.38,430.12 h60
  text "118.11mil (3.000mm)" at 4130.23,430.12 h60
  text "NPTH" at 5249.9,430.12 h60
  text "Slot" at 5755.78,430.12 h60
  text "Top Layer - Bottom Layer" at 6489.58,430.12 h60
  text "Pad" at 7989.13,430.12 h60
  text "Rounded" at 8578.98,430.12 h60
  text "r3000_300hn300_3000r100" at 9324.78,430.12 h60
  text "2" at 3540.38,280.12 h60
  text "47.24mil (1.200mm)" at 4130.23,280.12 h60
  text "NPTH" at 5249.9,280.12 h60
  text "Round" at 5755.78,280.12 h60
  text "Top Layer - Bottom Layer" at 6489.58,280.12 h60
  text "Pad" at 7989.13,280.12 h60
  text "Rounded" at 8578.98,280.12 h60
  text "c0hn120m125" at 9324.78,280.12 h60
  text "76" at 3540.38,130.12 h60
  text "43.31mil (1.100mm)" at 4130.23,130.12 h60
  text "PTH" at 5249.9,130.12 h60
  text "Round" at 5755.78,130.12 h60
  text "Top Layer - Bottom Layer" at 6489.58,130.12 h60
  text "Pad" at 7989.13,130.12 h60
  text "Rounded" at 8578.98,130.12 h60
  text "(Mixed)" at 9324.78,130.12 h60
  text "137" at 3540.38,-19.88 h60
  text "15.75mil (0.400mm)" at 4130.23,-19.88 h60
  text "PTH" at 5249.9,-19.88 h60
  text "Round" at 5755.78,-19.88 h60
  text "Top Layer - Bottom Layer" at 6489.58,-19.88 h60
  text "Via" at 7989.13,-19.88 h60
  text "Rounded" at 8578.98,-19.88 h60
  text "v80h40m0mx0" at 9324.78,-19.88 h60
  text "218 Total" at 3540.38,-169.88 h60
  text "Slot definitions :" at 3034.51,-314.85 h60
  text "Routed Path Length" at 4067.2,-314.85 h60
  text "= Calculated from tool start centre position to tool end centre position." at 5169.86,-314.85 h60
  text "Hole Length" at 4067.2,-414.83 h60
  text "= Routed Path Length + Tool Size = Slot length as defined in the PCB layout" at 4760,-414.83 h60
  text ".Layer_Name" at -6.11,-2118.64 h118.11
  text ".DRL" at 1635.42,-2118.64 h118.11
M20-Top Title Box:
  circle w10: c3064.92,-2383.24 r51.18
  region: 3046.23,-2098.34 2434.92,-2098.34 2407.59,-2168.24 2359.92,-2216.46 2304.92,-2143.24 2304.92,-2078.24 2349.92,-2023.24 2406.46,-2008.34 3046.23,-2008.34
  region: 2494.92,-2426.27 2071.46,-2426.27 2110.57,-2328.13 2419.92,-2328.13 2437.59,-2298.24 2524.54,-2398.57
  lines w10: 2110.57,-2328.13 2456.7,-2328.13 2335.99,-2188.85 cw(c2407,-2112.32) 2416.46,-2008.34 3076.46,-2008.34 3046.46,-2098.34 ; 2241.03,-1998.61 cw(c2336.54,-2036.82) 2345.86,-1934.36 ; 2242.57,-1997.33 2071.46,-2426.27 2832.19,-2426.27 ccw(c2841.98,-2318.62) 2942.34,-2358.77 ; 2311.06,-2152.25 2524.54,-2398.57 ; 2321.06,-2152.25 2529.92,-2393.24 ; 2321.06,-2142.25 2529.92,-2383.24 ; 2324.92,-2098.34 2836.46,-2098.34 ; 2326.06,-2137.25 2534.92,-2378.24 ; 2331.06,-2132.25 2539.92,-2373.24 ; 2336.06,-2127.25 2544.92,-2368.24 ; 2341.06,-2122.25 2549.92,-2363.24 ; 2343.22,-2045.38 2552.08,-2286.37 ; 2345.91,-1934.37 3111.64,-1934.37 2942.38,-2358.67 ; 2346.06,-2117.25 2552.78,-2355.76 ; 2346.06,-2107.25 2554.92,-2348.24 ; 2346.06,-2097.25 2554.92,-2338.24 ; 2346.06,-2062.25 2554.92,-2303.24 ; 2351.06,-2092.25 2559.92,-2333.24 ; 2351.06,-2077.25 2559.92,-2318.24 ; 2405.07,-2328.66 ccw(c2409.2,-2307.59) 2420.92,-2289.59 ; 2447.84,-2097.81 ccw(c2446.82,-2120.15) 2433.82,-2138.34 2526.92,-2245.77 cw(c2455.91,-2322.3) 2484.75,-2422.64 ; 2695.14,-2418.24 2808.89,-2088.34 ; 2703.89,-2416.27 2816.86,-2088.69 ; 2708.89,-2416.27 2821.86,-2088.69 ; 2718.89,-2416.27 2831.86,-2088.69 ; 2728.89,-2416.27 2841.86,-2088.69 ; 2738.89,-2416.27 2851.86,-2088.69 ; 2748.89,-2416.27 2861.86,-2088.69 ; 2758.89,-2416.27 2871.86,-2088.69 ; 2768.89,-2416.27 2881.86,-2088.69 ; 2778.89,-2416.27 2891.86,-2088.69 ; 2787.11,-2418.24 2900.86,-2088.34 ; 2900.86,-2098.34 3046.23,-2098.34 ; 3019.92,-2098.24 3049.92,-2008.24 ; 3026.46,-2098.34 3056.46,-2008.34 ; 3036.46,-2098.34 3066.46,-2008.34
  lines w11.81: -360.45,-2579.27 3182.86,-2579.27 3182.86,-1791.87 -360.45,-1791.87 ; -360.45,-2382.42 2001.76,-2382.42 ; -360.45,-2185.57 2001.76,-2185.57 ; -360.45,-1988.72 2001.76,-1988.72 ; -360.43,-2579.27 -360.43,-1791.87 ; 1214.36,-2579.27 1214.36,-1988.72 ; 2001.76,-2579.27 2001.76,-1791.87 ; 2695.14,-2418.24 2787.11,-2418.24
  text "Project: '.Board_Name'" at -321.07,-1918.49 h118.11
  text "Layer:" at -321.06,-2118.64 h118.11
  text "Gerber:" at 1253.29,-2118.64 h118.11
  text "Variant: '.VariantName'" at -321.07,-2315.49 h118.11
  text "Ref: '.Board_Reference'" at 1258.29,-2315.49 h118.11
  text "R" at 3044.92,-2413.24 h60
  text "Date: '.Board_Document_Date'" at -321.07,-2512.35 h118.11
  text "Rev: '.Board_PCB_Revision'" at 1256.05,-2512.35 h118.11
M21-Bottom Title Box:
  circle w10: c-235.14,-2383.24 r51.18
  region: 334.86,-2426.28 758.33,-2426.28 719.22,-2328.13 409.86,-2328.13 392.2,-2298.24 305.24,-2398.57
  region: -216.44,-2098.34 394.86,-2098.34 422.2,-2168.24 469.86,-2216.46 524.86,-2143.24 524.86,-2078.24 479.86,-2023.24 423.33,-2008.34 -216.44,-2008.34
  lines w10: -236.67,-2008.34 -206.67,-2098.34 ; -226.67,-2008.34 -196.67,-2098.34 ; -220.14,-2008.24 -190.14,-2098.24 ; -216.67,-2098.34 -246.67,-2008.34 413.33,-2008.34 cw(c422.78,-2112.32) 493.8,-2188.85 373.08,-2328.13 719.22,-2328.13 ; -216.44,-2098.34 -71.08,-2098.34 ; -112.59,-2358.67 -281.86,-1934.37 483.88,-1934.37 ; -112.56,-2358.77 ccw(c-12.19,-2318.62) -2.4,-2426.28 758.33,-2426.28 587.22,-1997.33 ; -71.08,-2088.34 42.68,-2418.24 ; -62.07,-2088.69 50.89,-2416.28 ; -52.07,-2088.69 60.89,-2416.28 ; -42.07,-2088.69 70.89,-2416.28 ; -32.07,-2088.69 80.89,-2416.28 ; -22.07,-2088.69 90.89,-2416.28 ; -12.07,-2088.69 100.89,-2416.28 ; -6.67,-2098.34 504.86,-2098.34 ; -2.07,-2088.69 110.89,-2416.28 ; 7.93,-2088.69 120.89,-2416.28 ; 12.93,-2088.69 125.89,-2416.28 ; 20.89,-2088.34 134.65,-2418.24 ; 269.86,-2333.24 478.72,-2092.25 ; 269.86,-2318.24 478.72,-2077.25 ; 274.86,-2348.24 483.72,-2107.25 ; 274.86,-2338.24 483.72,-2097.25 ; 274.86,-2303.24 483.72,-2062.25 ; 277.01,-2355.76 483.72,-2117.25 ; 277.71,-2286.37 486.57,-2045.38 ; 279.86,-2363.24 488.72,-2122.25 ; 284.86,-2368.24 493.72,-2127.25 ; 289.86,-2373.24 498.72,-2132.25 ; 294.86,-2378.24 503.72,-2137.25 ; 299.86,-2393.24 508.72,-2152.25 ; 299.86,-2383.24 508.72,-2142.25 ; 305.24,-2398.57 518.72,-2152.25 ; 345.03,-2422.64 cw(c373.88,-2322.3) 302.86,-2245.77 395.97,-2138.34 ccw(c382.96,-2120.15) 381.94,-2097.81 ; 408.86,-2289.59 ccw(c420.58,-2307.59) 424.72,-2328.66 ; 483.93,-1934.36 cw(c493.24,-2036.82) 588.76,-1998.61
  lines w11.81: 42.68,-2418.24 134.65,-2418.24 ; 820.66,-2579.27 820.66,-1791.87 ; 820.66,-2382.42 3182.86,-2382.42 ; 820.66,-2185.57 3182.86,-2185.57 ; 820.66,-1988.72 3182.86,-1988.72 ; 1608.06,-2579.27 1608.06,-1988.72 ; -360.45,-2579.27 3182.86,-2579.27 3182.86,-1791.87 -360.45,-1791.87 -360.45,-2579.27
  text "Project: '.Board_Name'" at 3135.85,-1918.49 h118.11
  text "Gerber:" at 1561.49,-2118.64 h118.11
  text "Layer:" at 3135.84,-2118.64 h118.11
  text "Ref: '.Board_Reference'" at 1561.49,-2315.49 h118.11
  text "Variant: '.VariantName'" at 3135.85,-2315.49 h118.11
  text "R" at -215.14,-2413.24 h60
  text "Rev: '.Board_PCB_Revision'" at 1563.74,-2512.35 h118.11
  text "Date: '.Board_Document_Date'" at 3135.85,-2512.35 h118.11

## Dimensions
0,2950 to 570.87,2950 on M2-Board Dimensions
2188.98,2950 to 2109.84,2560 on M2-Board Dimensions
2188.98,2950 to 2760,2950 on M2-Board Dimensions
570.87,2950 to 2188.98,2950 on M2-Board Dimensions
-82.68,2950 to -23.62,1.18 on M2-Board Dimensions
0,-73.62 to 2759.84,-26.38 on M2-Board Dimensions

## Text inside footprints (layer, text, board x,y; h text height)
B1: M14-Top Assembly "7" at 2388.39,525.4 h59.06 r135; M14-Top Assembly "8" at 2618.76,292.25 h59.06 r135; M14-Top Assembly "1" at 2363.34,336.1 h59.06 r45; M14-Top Assembly "2" at 2398.83,295.04 h59.06 r45; M14-Top Assembly "3" at 2437.81,256.06 h59.06 r45; M14-Top Assembly "4" at 2537.33,511.48 h59.06 r45; M14-Top Assembly "5" at 2577,473.21 h59.06 r45; M14-Top Assembly "6" at 2615.97,434.23 h59.06 r45; Top Overlay "1" at 2332.02,304.78 h59.06 r45
CN1: M15-Bottom Assembly "45" at 962.76,1337.99 h39.37; M15-Bottom Assembly "1" at 1815.12,1337.99 h39.37; Bottom Overlay "45" at 932.24,1378.35 h59.06; Bottom Overlay "1" at 1835.79,1378.35 h59.06
CN2: M15-Bottom Assembly "1" at 111,2653 h59.06 r270; M15-Bottom Assembly "2" at 211,2647 h59.06 r270; M15-Bottom Assembly "38" at 211.66,833.16 h59.06 r270; M15-Bottom Assembly "37" at 111.66,832.66 h59.06 r270; Bottom Overlay "1" at 70.87,2642.91 h59.06
CN3: M15-Bottom Assembly "37" at 2511.66,832.66 h59.06 r270; M15-Bottom Assembly "38" at 2611.66,833.16 h59.06 r270; M15-Bottom Assembly "2" at 2611,2647 h59.06 r270; M15-Bottom Assembly "1" at 2511,2653 h59.06 r270; Bottom Overlay "1" at 2468.5,2638.98 h59.06
HW2: M14-Top Assembly "Product 25x5 sticker" at 466.73,1777.99 h59.06 r90; Top Overlay "Product 25x5 sticker" at 466.12,1777.99 h59.06 r90
HW3: M14-Top Assembly "Board 25x5 sticker" at 461.73,731.69 h47.24 r90; Top Overlay "Board 25x5 sticker" at 461.24,731.69 h47.24 r90
LCD1: M14-Top Assembly "THE ESD" at 1374.53,-467.39 h59.06; M14-Top Assembly "240 * RGB * 320" at 963.11,1736.22 h118.11; M14-Top Assembly "2.2\" TFT" at 1179.65,1893.7 h118.11; M14-Top Assembly "ADD" at 1502.48,-397.83 h59.06; M14-Top Assembly "6 o'clocck" at 963.11,1125.98 h118.11; M14-Top Assembly "CIRCUIT" at 1374.53,-536.29 h59.06; M14-Top Assembly "BENDING" at 1260.75,91.73 h59.06; M14-Top Assembly "AREA" at 1195.39,22.18 h59.06; M14-Top Assembly "1" at 1802.68,-1105.51 h59.06; M14-Top Assembly "45" at 923.74,-1103.54 h59.06; M14-Top Assembly "STIFFENER PI" at 1201.3,-982.48 h59.06; M14-Top Assembly "DISPLAYTECH" at 1197.36,-781.69 h59.06; Top Overlay "BENDING" at 1260.75,91.73 h59.06; Top Overlay "AREA" at 1195.39,22.18 h59.06; Top Overlay "6 o'clocck" at 951.3,1125.98 h118.11; Top Overlay "ADD" at 1502.48,-397.83 h59.06; Top Overlay "CIRCUIT" at 1374.53,-536.29 h59.06; Top Overlay "THE ESD" at 1374.53,-467.39 h59.06; Top Overlay "2.2\" TFT" at 1179.65,1893.7 h118.11; Top Overlay "240 * RGB * 320" at 842.52,1690.16 h118.11; Top Overlay "DISPLAYTECH" at 1197.36,-781.69 h59.06; Top Overlay "STIFFENER PI" at 1201.3,-982.48 h59.06; Top Overlay "45" at 933.58,-980.31 h59.06; Top Overlay "1" at 1839.09,-1108.27 h59.06; Top Overlay "1" at 1799.72,-980.31 h59.06
U1: M15-Bottom Assembly "8" at 1263.74,2109.13 h59.06 r90; M15-Bottom Assembly "5" at 1263.74,1958.54 h59.06 r90; M15-Bottom Assembly "4" at 1543.66,1959.53 h59.06 r90; M15-Bottom Assembly "1" at 1543.66,2104.21 h59.06 r90; Bottom Overlay "1" at 1543.31,2138.98 h59.06 r90